# Altium PCB ECG_Ctrl_V1.0_ZM_20211208.PcbDoc (part 2 of 2)
Units mil, origin at the board's own origin, x right, y up, seen from the top; angles counter-clockwise.
Board outline 3748.77 x 3514.71 mil, 2 copper layers (Top Layer, Bottom Layer); 220 components, 162 nets, 692 pads, 666 vias.
Unrouted connection lines stored in the file: 1.
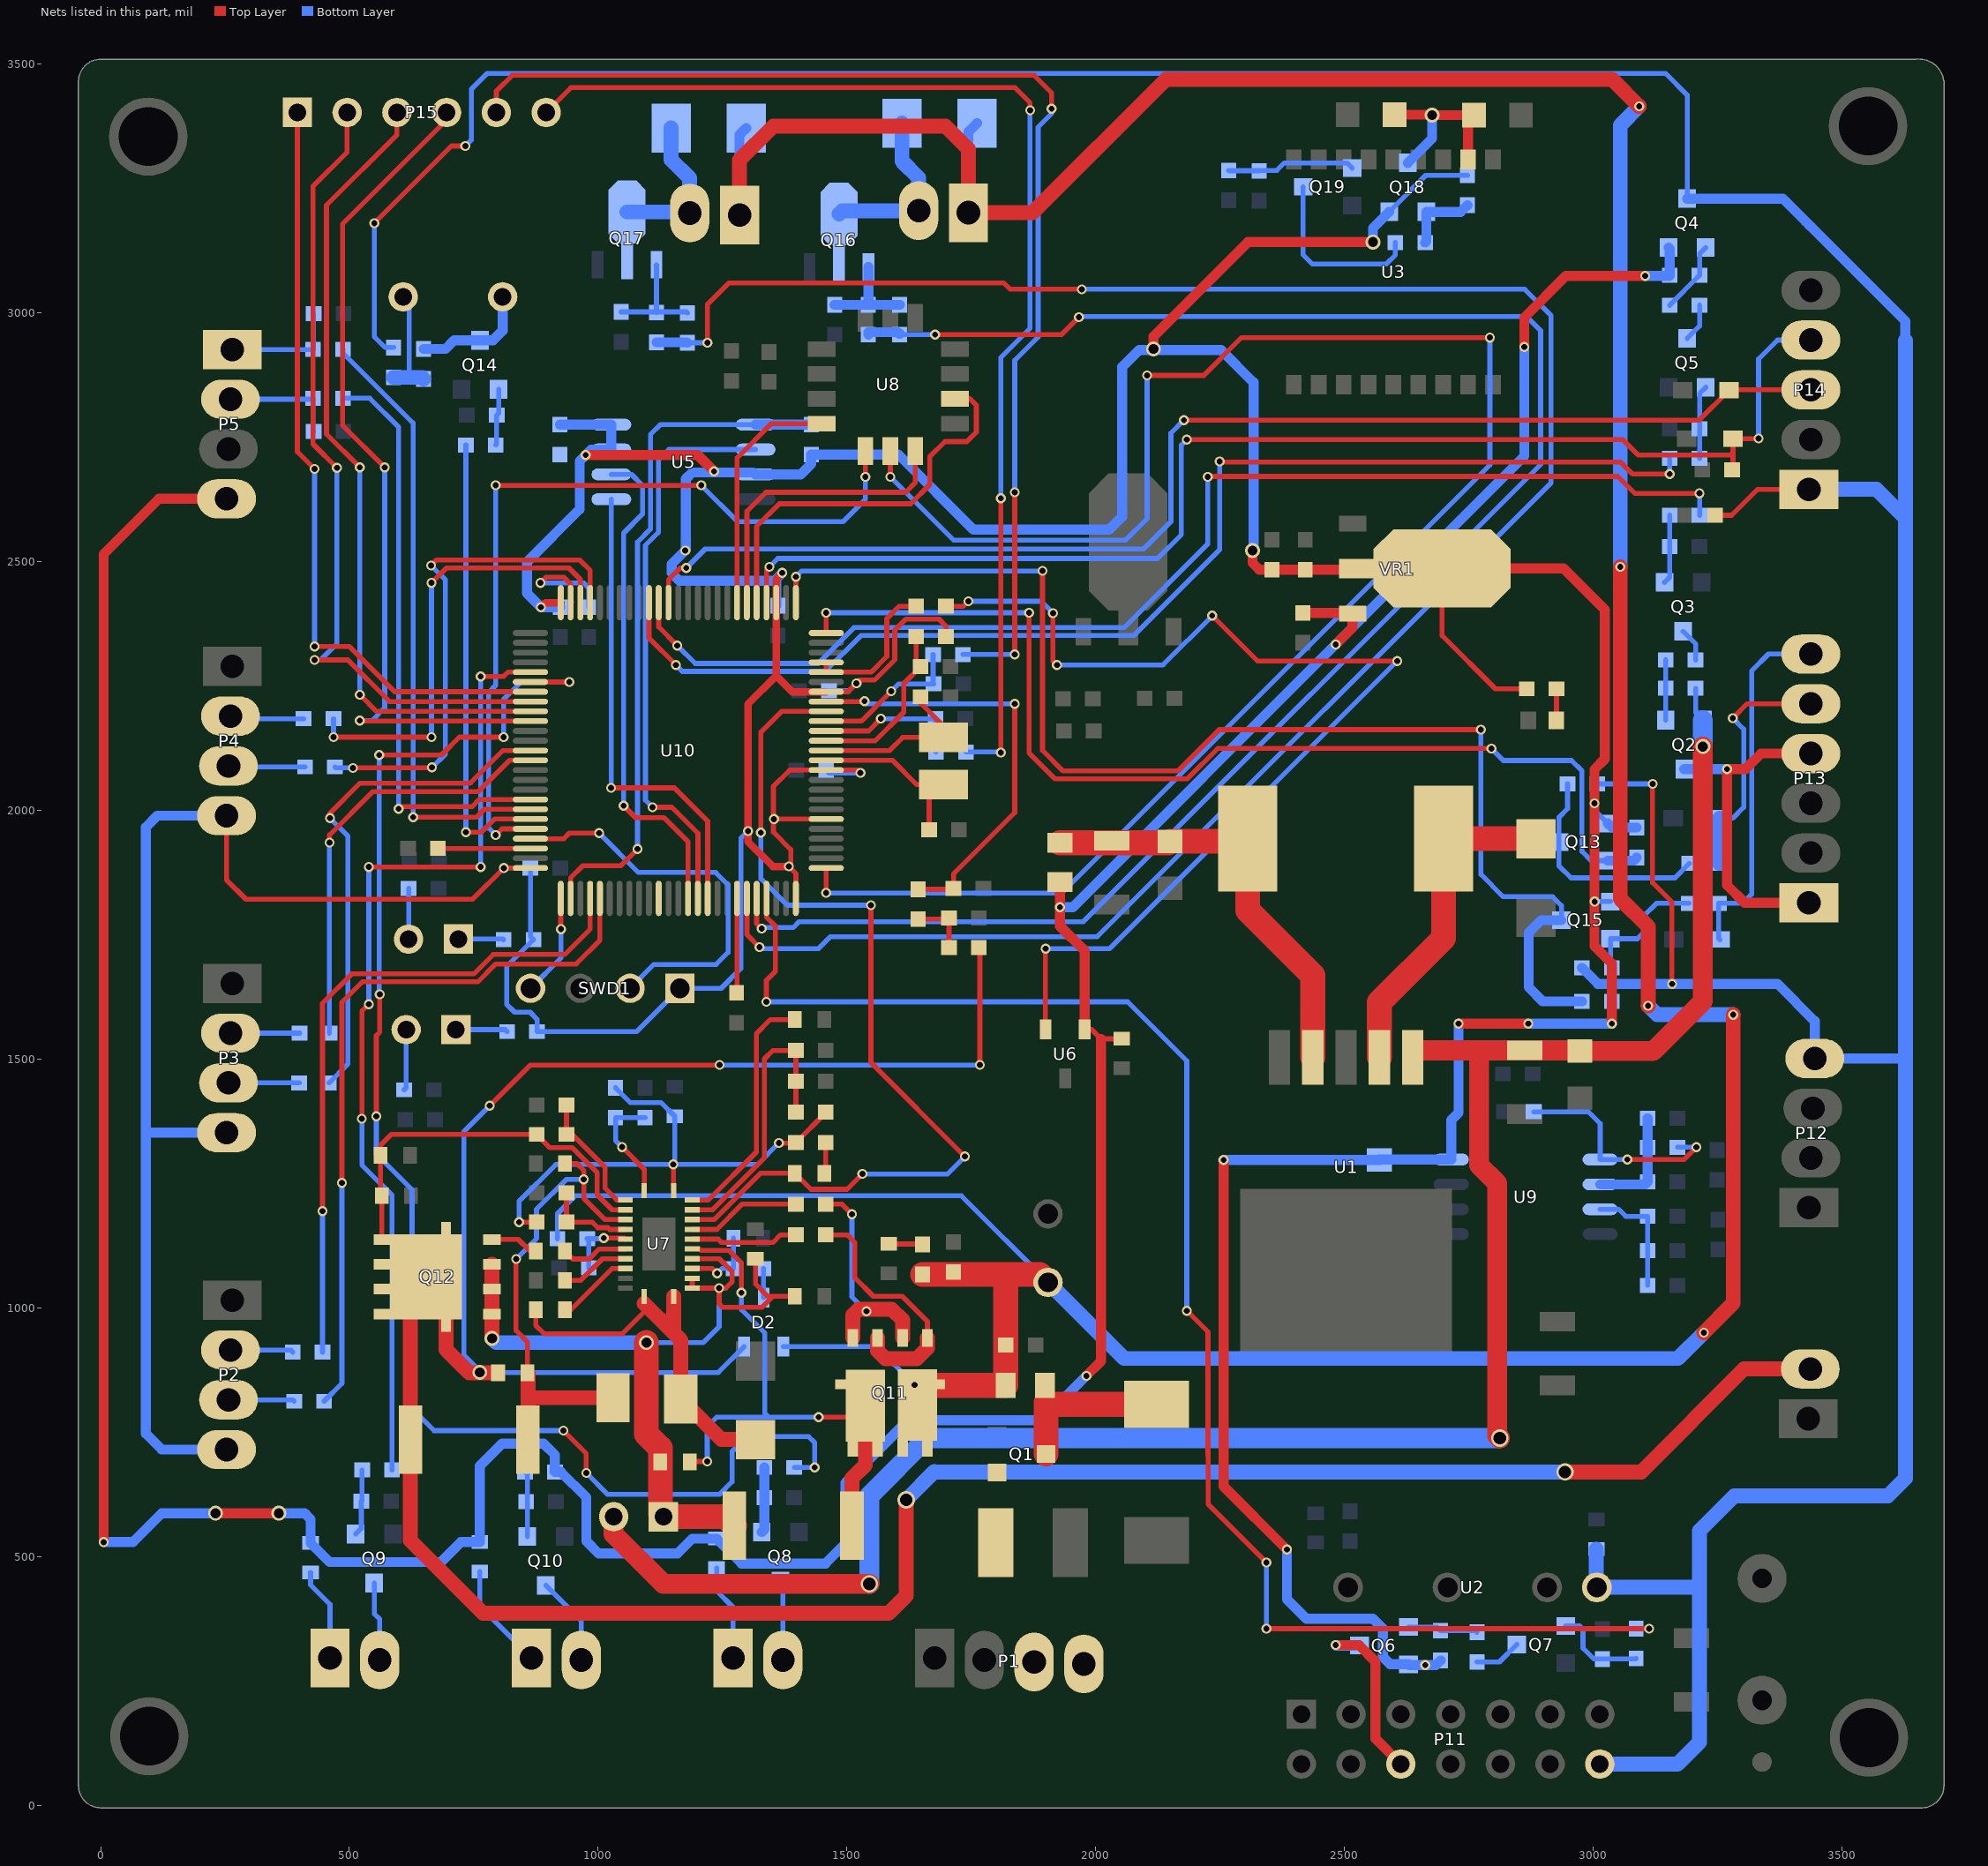
[diagram p2: the nets of this part, all layers, seen from the top]

## Via types
v1: diameter 30, hole 20, Top Layer to Bottom Layer, tented both sides, 436 vias
v2: diameter 20, hole 12, Top Layer to Bottom Layer, tented both sides, 224 vias
v3: diameter 35, hole 25, Top Layer to Bottom Layer, tented both sides, 4 vias
v4: diameter 40, hole 25, Top Layer to Bottom Layer, tented both sides, 2 vias

## Nets (pads, with @x,y where several pads share a name; then routed paths per layer and width w, separated by ;. In a path a pad name is that pad's centre, name@x,y a point inside that pad or via, vN(x,y) a via of type N, cw(c..) or ccw(c..) an arc to the next point about the centre after c; other vN are vias at no path point) (continued)
LED1: R29.1 U10.55 | length 1954.1
  Top Layer w10: v2(525,1380) 525,1596 v2(539,1610) ; v2(539,1886) v2(764,1886) ; v2(764,2269) 810,2269 818.48,2277.48 U10.55@863.76,2277.48
  Bottom Layer w10: v2(525,1380) 525,1287 585.54,1226.46 R29.1@585.54,674 ; v2(539,1610) v2(539,1886) ; v2(764,1886) v2(764,2269)
LED2: R28.1 U10.56 | length 2995
  Top Layer w10: v2(554,1385) 554,1547 561,1554 v2(561,1630) ; v2(560,2111) 685,2111 721,2147 v2@809,2147 ; U10.56@863.76,2257.8 v2(942.2,2257.8) ; v2(930,753) 976,707 v2(976,668)
  Bottom Layer w10: v2(554,1385) 554,1309 626,1237 626,797 670,753 v2(930,753) ; v2(560,2111) 560,1631 v2(561,1630) ; v2(810,2147) 810,2223.11 844.69,2257.8 v2(942.2,2257.8) ; v2(976,668) 1019,625 1244,625 1269,650 1269,711 1299,741 1423,741 1435,729 v2(1435,679) R28.1@1394,679
LED_BLUE: U10.86
MMR_CS: U8.5 U10.71 | length 1678.4
  Top Layer w10: v2(794,1950) 806.52,1962.52 U10.71@863.76,1962.52 ; v2(794,2653) v2(1207,2653) ; v2(1537,2670) U8.5@1537,2721.95
  Bottom Layer w10: v2(794,1950) 780,1964 780,2237 794,2251 v2(794,2653) ; v2(1207,2653) 1280,2580 1492,2580 1537,2625 v2(1537,2670)
MMR_DIN: U8.4 U10.32 | length 489.4
  Top Layer w10: U10.32@1279.11,2417.24 1279.11,2708.11 1347.87,2776.87 U8.4@1449.2,2776.87
MMR_DO: U8.7 U10.31 | length 609.4
  Top Layer w10: U10.31@1298.8,2417.24 1298.8,2600.8 1337,2639 1618,2639 1637,2658 U8.7@1637,2721.95
MMR_RD: U8.6 U10.1 | length 3643
  Top Layer w10: v2(1458.24,1833.76) U10.1@1458.24,1883.78 ; v2(1587,2670) U8.6@1587,2721.95 ; v2(2103,2874) 2217,2874 2293,2950 v2(2792,2950)
  Bottom Layer w10: v2(1458.24,1833.76) 1931.76,1833.76 2792,2694 v2(2792,2950) ; v2(1587,2670) 1714,2543 2060,2543 2103,2586 v2(2103,2874)
MMR_SCLK: U8.9 U10.30 | length 808.5
  Top Layer w10: U10.30@1318.48,2417.24 1318.48,2570.48 1364,2616 1628,2616 1666.5,2654.5 1666.5,2710.5 1697,2741 1741,2741 1760,2760 1760,2814 1747.13,2826.87 U8.9@1716.92,2826.87
MOTOR: C166.2 R188.2 U10.95 | length 4344.6
  Top Layer w10: v2(1219.49,2939.51) 1219.49,3016.49 1263,3060 1815,3060 1828,3047 v2(1972,3047) ; U10.95@1298.8,1822.76 1298.8,1750.2 v2(1324,1725)
  Bottom Layer w10: C166.2@1179.26,2939.51 v2(1219.49,2939.51) ; v2(1324,1725) 1327,1722 1443,1722 1467,1746 2003,1746 2915,2658 2915,2994 2862,3047 v2(1972,3047)
  Bottom Layer w20: R188.2@1117.26,2940.51 1178.26,2940.51 C166.2@1179.26,2939.51
NetBEEP1_1: BEEP1.1 R56.1 R58.2 | length 228.2
  Bottom Layer w10: BEEP1.1@608,3032 620,3020 620,2870
  Bottom Layer w30: R56.1@589,2870 620,2870 646,2870 R58.2@649,2867
NetBEEP1_2: BEEP1.2 Q14.3 R58.1 | length 242.3
  Bottom Layer w20: R58.1@649,2927 693,2927 710.43,2944.43 Q14.3@762.6,2944.43 788.43,2944.43 808,2964 BEEP1.2@808,3032
NetC2_1: C2.1 C4.2 F1.1 L1.2 U1.4 | length 875
  Top Layer w50: F1.1@1928,1934.42 2146,1934.42 C4.2@2149,1937.42 2299.57,1937.42 L1.2@2305.15,1943 2305.15,1798.85 2436.07,1667.93 U1.4@2436.07,1502.94
NetC19_1: C19.1 R24.1 U10.16 | length 306.2
  Top Layer w10: U10.16@1458.24,2179.06 1529.06,2179.06 v2(1589,2239)
  Bottom Layer w10: v2(1589,2239) 1604,2254 C19.1@1674,2254 1673,2255 R24.1@1673,2313
NetC20_1: C20.1 R23.1 U10.15 | length 297.4
  Top Layer w10: U10.15@1458.24,2159.37 1543.37,2159.37 v2(1568,2184)
  Bottom Layer w10: v2(1568,2184) C20.1@1678,2184 1678,2118 R23.1@1679,2117
NetC22_1: C22.1 C23.2 C25.1 P9.1 Q12.1 Q12.2 Q12.3 R34.2 U7.2 U7.3 U7.5 | length 1722.3
  Top Layer w10: U7.3@1189.07,1059.1 1189.07,1039.49 U7.2@1189,1039.42 v2(1243,1039.42) ; U7.5@1189.07,1098.47 1243.53,1098.47 1269,1073 1269,1052 1256.42,1039.42 v2(1243,1039.42) ; C25.1@1315.91,1098.47 1315.91,1048.09 1340.84,1023.16 1351.16,1023.16 ; C22.1@1395.46,1023.16 1351.16,1023.16 ; v2(1243,1039.42) 1243,1008 1250.29,1000.71 1328.71,1000.71 1351.16,1023.16
  Top Layer w30: v1(786.78,938.22) Q12.1@786.78,987.37 Q12.2@786.78,1037.37 Q12.3@786.78,1087.37
  Top Layer w50: v1(1097,930) 1097,746 1125,718 C23.2@1125,690 1125,586 P9.1@1131,580 1255.78,580 R34.2@1273.78,562
  Bottom Layer w10: v1(1097,930) 1211,930 1243,962 v2(1243,1039.42)
  Bottom Layer w30: v1(786.78,938.22) 795,930 v1(1097,930)
NetC23_1: C23.1 Q11.5 Q11.6 R34.1 U7.6 | length 1121.4
  Top Layer w10: C23.1@1184.06,690 1185.17,691.11 v2(1219,691.11) ; 1204,1118.16 1207.16,1115 1263,1115 1288,1090 v2(1288,1030) ; v2(1443,780) 1513.75,780 Q11.5@1536.91,803.16
  Top Layer w30: R34.1@1510,562 1510,657 1536.91,683.91 Q11.5@1536.91,803.16
  Bottom Layer w10: v2(1219,691.11) 1219,761 1238,780 1343,780 ; v2(1288,1030) 1288,996 1335,949 1335,788 1343,780 ; v2(1443,780) 1343,780
NetC24_1: C24.1 R35.1 | length 68.4
  Top Layer w10: C24.1@1583.91,1128.21 1650.86,1128.21 R35.1@1651.91,1127.16
NetC27_2: C27.2 C28.2 L4.2 R40.1 U7.16 | length 983.5
  Top Layer w10: v2(835,1098) 835,954.22 857.91,931.3 C28.2@857.91,869.16 ; C27.2@933.52,1289.88 957.12,1289.88 971,1276 v2(971,1258) 971,1220 1013.79,1177.21 U7.16@1054.91,1177.21
  Top Layer w30: C28.2@857.91,869.16 858.91,868.16 858.91,824 ; R40.1@858.91,735.16 858.91,824 ; L4.2@1029.91,819.16 863.75,819.16 858.91,824
  Bottom Layer w10: v2(835,1098) 876,1139 876,1198 936,1258 v2(971,1258)
NetC29_1: C29.1 D4.2 L4.1 U7.1 U7.24 | length 784.7
  Top Layer w10: C29.1@874.46,996.16 874.46,964.54 891,948 1049,948 1092.47,991.47 1092.47,1008.53 U7.24@1092.47,1022.58
  Top Layer w30: U7.24@1092.47,1008.53 1151.53,949.47 ; U7.1@1151.53,1022.58 1151.53,949.47 ; D4.2@1315.91,735.16 1247.43,735.16 L4.1@1165.74,816.85 1165.74,935.26 1151.53,949.47
NetC29_2: C29.2 U7.21 | length 155.6
  Top Layer w10: C29.2@933.52,996.16 945.16,996.16 1027.79,1078.79 U7.21@1054.91,1078.79
NetC32_1: C32.1 R45.2 U7.4 | length 152.3
  Top Layer w10: U7.4@1189.07,1078.79 1229.37,1078.79 v2(1239,1069.16)
  Bottom Layer w10: v2(1239,1069.16) 1248.63,1078.79 R45.2@1272.13,1078.79 1271.94,1078.97 C32.1@1271.94,1140
NetC33_2: C33.2 U7.20 | length 139.4
  Top Layer w10: C33.2@933.52,1054.9 964.9,1054.9 1008.47,1098.47 U7.20@1054.91,1098.47
NetC34_1: C34.1 U7.11 | length 496
  Top Layer w10: U7.11@1189.07,1216.58 1221.58,1216.58 1318,1313 1318,1551 1346.16,1579.16 C34.1@1395.46,1579.16
NetC36_1: C36.1 U10.12 Y1.2 | length 317.4
  Top Layer w10: U10.12@1458.24,2100.31 1591.69,2100.31 1640.55,2051.45 1665,2051.45 C36.1@1665,1961
NetC37_1: C37.1 R61.1 R63.2 U9.2 | length 225.3
  Bottom Layer w20: U9.2@3013.61,1248 3103.8,1248 R63.2@3109,1253.2 R61.1@3109,1322.6 C37.1@3109,1381
NetC39_2: C39.2 U10.49 | length 250.4
  Top Layer w10: v2(884,2457) 895,2468 931.4,2468 944.46,2454.94 U10.49@944.46,2417.24 U10.49@946,2418.78
  Bottom Layer w10: v2(884,2457) 971,2457 981,2447 C39.2@981,2408
NetC40_2: C40.2 R78.1 U10.14 | length 349.6
  Top Layer w10: U10.14@1458.24,2139.68 1556.69,2139.68 1614,2197 1614,2254.66 C40.2@1648,2288.67 1639,2297.67 R78.1@1639,2349.33
NetC41_2: C41.2 R65.2 R66.2 U9.3 | length 240.1
  Bottom Layer w10: U9.3@3013.61,1198 3051,1198 3065.2,1183.8 R65.2@3109,1183.8 C41.2@3109,1115 R66.2@3109,1045
NetC45_2: C45.2 U10.73 | length 185.8
  Top Layer w10: C45.2@678,1923.15 U10.73@863.76,1923.15
NetC50_1: C50.1 U10.13 Y1.1 | length 347.4
  Top Layer w10: U10.13@1458.24,2120 1585.76,2120 1612,2146.24 Y1.1@1694,2146.24 1694,2169 1648,2215 C50.1@1648,2228
NetC165_1: C165.1 Q16.1 R187.1 R189.1 | length 207.2
  Bottom Layer w20: R189.1@1475,3016 R187.1@1543,3016 ; Q16.1@1543.06,3092.13 1543.06,3016.06 R187.1@1543,3016 ; C165.1@1606,3016 R187.1@1543,3016
NetC166_1: C166.1 Q17.1 R188.1 R190.1 | length 229.5
  Bottom Layer w10: R190.1@1046.26,3001.51 R188.1@1117.06,3001.51 ; Q17.1@1117.06,3096.13 R188.1@1117.06,3001.51 ; R188.1@1117.26,3000.51 1117.06,3000.71 R188.1@1117.06,3001.51 ; C166.1@1179.26,2999.51 1177.26,3001.51 R188.1@1117.06,3001.51
NetD1_1: D1.1 F2.1 Q1.3 | length 327.4
  Top Layer w50: Q1.3@1900.21,706 1900.21,810 1904.21,806 D1.1@2122,806
NetD2_3: D2.3 R45.1 | length 58.6
  Bottom Layer w10: R45.1@1332.13,1078.79 1332.13,1020.92 D2.3@1332.63,1020.43
NetD3_2: D3.2 L1.1 U1.2 | length 679.8
  Top Layer w50: U1.2@2569.93,1502.94 2569.93,1613.93 2698.85,1742.85 L1.1@2698.85,1943 2884.48,1943 D3.2@2885,1942.48
NetD7_1: D7.1 P22.2 Q16.2 | length 352.6
  Bottom Layer w30: Q16.2@1484,3198.43 1490.5,3204.94 P22.2@1644,3204.94 1644,3271 1610.61,3304.39 D7.1@1610.61,3381
NetD8_1: D8.1 P27.2 Q17.2 | length 313.1
  Bottom Layer w30: Q17.2@1058,3202.43 1181.87,3202.43 P27.2@1184,3200.31 1184,3270 1146.61,3307.39 D8.1@1146.61,3371
NetDS1_1: DS1.1 P1.3 P1.4 Q1.2
NetL3_2: L3.2 U10.21 U10.22 | length 299.9
  Top Layer w10: U10.22@1458.24,2297.17 U10.21@1458.24,2277.48 1548.48,2277.48 1580,2309 1580,2385 1605,2410 L3.2@1639,2410
NetLED1_1: LED1.1 R1.2 | length 63.7
  Top Layer w10: LED1.1@2925.56,2180.48 2926,2180.92 R1.2@2926,2244
NetLED2_1: LED2.1 R49.2 | length 62.7
  Top Layer w10: LED2.1@1454.52,1270.27 1457.21,1272.97 R49.2@1457.21,1331.83
NetNC_2: NC.2 U5.1 U10.77 | length 1374.9
  Top Layer w10: U10.77@944.46,1822.76 944.46,1864 968.96,1888.5 1045.5,1888.5 v2(1079,1922)
  Bottom Layer w10: v2(1079,1922) 1079,2539 1105,2565 1105,2755 1125,2775 U5.1@1316.37,2775
  Bottom Layer w20: U5.1@1316.37,2775 NC.2@1428,2775
NetP2_2: P2.2 R20.1 | length 126.7
  Bottom Layer w10: P2.2@260.94,915 382,915 R20.1@386,911
NetP2_3: P2.3 R19.1 | length 133.2
  Bottom Layer w10: P2.3@257,815 386,815 R19.1@389,812
NetP3_2: P3.2 R22.1 | length 139.1
  Bottom Layer w10: P3.2@260.94,1552 R22.1@400,1552
NetP3_3: P3.3 R21.1 | length 142
  Bottom Layer w10: P3.3@257,1452 R21.1@399,1452
NetP4_2: P4.2 R11.1 | length 149.1
  Bottom Layer w10: P4.2@260.94,2189 265.94,2184 R11.1@408,2184
NetP4_3: P4.3 R9.1 | length 154.8
  Bottom Layer w10: P4.3@257,2089 259,2087 R9.1@411,2087
NetP5_1: P5.1 R12.1 TVS4.2 | length 234.5
  Bottom Layer w10: P5.1@264.87,2926 R12.1@427,2926 428,2927 TVS4.2@428,2998
NetP5_2: P5.2 R10.1 TVS3.2 | length 234.3
  Bottom Layer w10: P5.2@260.94,2826 425,2826 R10.1@427,2828 427,2762 TVS3.2@428,2761
NetP6_1: P6.1 R25.1 | length 194.7
  Bottom Layer w10: R25.1@1238,477 1238,431 1271,398 P6.1@1271,296
NetP6_2: P6.2 Q8.3 | length 160.8
  Bottom Layer w10: Q8.3@1366,450.79 1371,445.79 P6.2@1371,292.06
NetP7_1: P7.1 R26.1 | length 188.2
  Bottom Layer w10: R26.1@422,468 422,443 461,404 P7.1@461,296
NetP7_2: P7.2 Q9.3 | length 159.3
  Bottom Layer w10: Q9.3@550,446.79 550,385 561,374 P7.2@561,292.06
NetP8_1: P8.1 R27.1 | length 217
  Bottom Layer w10: R27.1@762,469.94 762,400 P8.1@866,296
NetP8_2: P8.2 Q10.3 | length 179.2
  Bottom Layer w10: Q10.3@895,441.84 966,370.84 P8.2@966,292.06
NetP10_1: P10.1 R47.1 R50.2 U7.10 | length 580.9
  Top Layer w10: U7.10@1189.07,1196.9 1229.9,1196.9 1334,1301 1334,1500 1351.16,1517.16 P10.1@1397.21,1517.16 R50.2@1397.21,1455.39 R47.1@1397.21,1393.61
NetP14_3: P14.3 TVS6.2 U10.39 | length 2604.1
  Top Layer w10: U10.39@1141.31,2417.24 1141.31,2463.31 1165,2487 v2(1177,2487) ; v2(2177,2784) 3212.46,2784 TVS6.2@3272.46,2844 3273.46,2845 P14.3@3437,2845
  Bottom Layer w10: v2(1177,2487) 1215,2525 2096,2525 2151,2580 2151,2758 v2(2177,2784)
NetP14_4: P14.4 R54.2 TVS1.2 U10.29 | length 2635.7
  Top Layer w10: U10.29@1338.17,2417.24 1338.17,2483.17 v2(1344,2489) ; v2(2183,2745) 3059,2745 3090,2714 3275.46,2714 3280.46,2719 ; R54.2@3279,2684 3280.46,2685.46 3280.46,2719 ; TVS1.2@3282.46,2745 TVS1.2@3280.46,2747 ; v2(3332,2747) TVS1.2@3280.46,2747 ; 3280.46,2719 TVS1.2@3280.46,2747
  Bottom Layer w10: v2(1344,2489) 1361,2506 2124,2506 2172,2554 2172,2734 v2(2183,2745) ; v2(3332,2747) 3332,2907 3370,2945 P14.4@3437,2945
NetP16_1: P16.1 R183.1 | length 91.4
  Bottom Layer w10: P16.1@719,1741 809,1741 R183.1@810,1740
NetP16_2: P16.2 R184.1 | length 102
  Bottom Layer w10: P16.2@619,1741 R184.1@619,1843
NetP17_1: P17.1 R185.1 | length 104.7
  Bottom Layer w10: P17.1@714,1559 813,1559 R185.1@817,1555
NetP17_2: P17.2 R186.1 | length 122.7
  Bottom Layer w10: R186.1@610,1438 614,1442 P17.2@614,1559
NetQ2_1: Q2.1 R2.2 R3.2 | length 121
  Bottom Layer w10: Q2.1@3145.32,2181 R2.2@3145.32,2245 R3.2@3145.32,2302
NetQ3_1: Q3.1 R4.2 R5.2 | length 139.3
  Bottom Layer w10: Q3.1@3143,2458 3153.32,2468.32 R5.2@3153.32,2530 R4.2@3153.32,2593
NetQ3_3: Q3.3 R3.1 | length 67.9
  Bottom Layer w10: Q3.3@3180.4,2359.57 3205.32,2334.65 R3.1@3205.32,2302
NetQ4_1: Q4.1 R6.2 R7.2 | length 145.9
  Bottom Layer w10: R7.2@3153.32,3015 R6.2@3213.32,3075 3213.32,3118.2 Q4.1@3225.91,3130.79
NetQ5_1: Q5.1 R13.2 R14.2 | length 148.2
  Bottom Layer w10: R13.2@3213.32,2707 R14.2@3213.32,2767 3213.32,2837.42 Q5.1@3225.91,2850
NetQ5_3: Q5.3 R7.1 | length 76.9
  Bottom Layer w10: Q5.3@3188.5,2948.43 3213.32,2973.24 R7.1@3213.32,3015
NetQ6_1: Q6.1 R15.2 R16.2 | length 141.9
  Bottom Layer w10: Q6.1@2628.43,358.4 2685.6,358.4 R15.2@2693,351 2763,351 R16.2@2766,348
NetQ7_1: Q7.1 R17.2 R18.2 | length 191.8
  Bottom Layer w10: Q7.1@2944.43,360.4 2972.6,360.4 2979,354 2979,316 3001,294 R18.2@3018,294 3085,294 R17.2@3086,295
NetQ7_3: Q7.3 R16.1 | length 94.5
  Bottom Layer w10: R16.1@2766,288 2811,288 Q7.3@2846,323
NetQ8_1: Q8.1 R28.2 R31.1 | length 132
  Bottom Layer w20: Q8.1@1328.6,549.21 1334,554.61 R31.1@1334,618 R28.2@1334,679
NetQ9_1: Q9.1 R29.2 R32.1 | length 134.1
  Bottom Layer w10: Q9.1@512.6,545.21 524,556.61 R32.1@524,611 525.54,612.54 R29.2@525.54,674
NetQ10_1: Q10.1 R30.2 R33.1 | length 131.6
  Bottom Layer w10: R30.2@853,670 857.6,665.4 Q10.1@857.6,540.27
NetQ11_1: Q11.1 Q11.3 R36.1 | length 512.9
  Top Layer w10: R36.1@1457.21,1146.5 1500.5,1146.5 1516,1131 1516,1060 1553,1023 1611,1023 1661.57,972.43 Q11.1@1661.57,939.04
  Top Layer w30: Q11.3@1561.57,939.04 1561.57,913.43 1577.51,897.49 1640.49,897.49 1661.57,918.57 Q11.1@1661.57,939.04
NetQ11_2: Q11.2 Q11.4 R37.2 | length 464.8
  Top Layer w10: R37.2@1457.21,1208.28 1489.73,1208.28 v2(1510,1188)
  Top Layer w30: Q11.4@1511.57,939.04 1511.57,985.57 1523,997 1590,997 1611.57,975.43 Q11.2@1611.57,939.04
  Bottom Layer w10: v2(1510,1188) 1510,1022 v2(1539,993)
NetQ12_4: Q12.4 R39.2 | length 97.5
  Top Layer w10: Q12.4@786.78,1137.37 839.28,1137.37 863,1113.65 R39.2@874.46,1113.65
NetQ13_2: Q13.2 R62.1 U10.25 | length 2189.3
  Top Layer w10: U10.25@1458.24,2356.22 v2(1458.24,2397) ; v2(1866,2397) 1866,2115 1918,2063 2184,2063 2245,2124 v2(2795,2124)
  Bottom Layer w10: v2(1458.24,2397) v2(1866,2397) ; v2(2795,2124) 2819,2100 2956,2100 2977,2079 2977,1917 2995.4,1898.6 Q13.2@3029.21,1898.6
  Bottom Layer w20: Q13.2@3029.21,1898.6 3080.6,1898.6 R62.1@3087,1905
NetQ13_3: Q13.3 R55.2 R60.1 | length 456.1
  Bottom Layer w10: R60.1@2948,2053 2948,2003 2930.79,1985.79 Q13.3@2930.79,1936 2930.79,1888.27 2955.06,1864 3164,1864 R55.2@3193,1893
NetQ14_1: Q14.1 R57.2 R59.1 | length 114.5
  Bottom Layer w10: R57.2@794,2734 796,2736 R59.1@796,2794 800,2798 Q14.1@800,2846
NetQ15_2: Q15.2 R52.2 R53.2 | length 266.4
  Bottom Layer w10: R52.2@3037,1683 3034.21,1685.79 Q15.2@3034.21,1741.6 3088.6,1741.6 3101.5,1754.5 3101.5,1787.5 3127,1813 R53.2@3192,1813
NetQ15_3: Q15.3 R67.2 U10.26 | length 2657.7
  Top Layer w10: U10.26@1397.22,2417.24 v2(1397.22,2469.22) ; v2(1893,2481) 1893,2120 1934,2079 2165,2079 2248,2162 v2(2774,2162)
  Bottom Layer w10: v2(1397.22,2469.22) 1409,2481 v2(1893,2481) ; v2@2774,2161 2774,1871 2818.84,1826.16 2917.84,1826.16 2935.79,1808.21 Q15.3@2935.79,1779
  Bottom Layer w20: Q15.3@2935.79,1779 2895,1779 2870,1754 2870,1644 2898,1616 R67.2@2977,1616
NetQ18_1: Q18.1 R68.2 R69.2 | length 150.7
  Bottom Layer w20: R69.2@2662,3141 2664.4,3143.4 Q18.1@2664.4,3202.57 2733.57,3202.57 R68.2@2747,3216
NetQ19_1: Q19.1 R70.2 R71.2 | length 320.2
  Bottom Layer w10: R71.2@2328,3285 2268,3285 R70.2@2267,3286 2364,3286 2379,3301 2504.61,3301 Q19.1@2515.21,3290.4
NetQ19_3: Q19.3 R69.1 | length 362
  Bottom Layer w10: Q19.3@2416.79,3253 2416.79,3116.21 2435,3098 2584,3098 2602,3116 R69.1@2602,3141
NetR36_2: R36.2 U7.7 | length 217.4
  Top Layer w10: U7.7@1189.07,1137.84 1241.16,1137.84 1248,1131 1351,1131 1366.5,1146.5 R36.2@1397.21,1146.5
NetR37_1: R37.1 U7.8 | length 229.2
  Top Layer w10: U7.8@1189.07,1157.53 1238.53,1157.53 1289.27,1208.28 R37.1@1397.21,1208.28
NetR38_1: R38.1 R41.2 U7.17 | length 183.5
  Top Layer w10: R41.2@936.21,1230.92 R38.1@936.21,1172.18 987.82,1172.18 999,1161 1019.7,1161 1023.17,1157.53 U7.17@1054.91,1157.53
NetR39_1: R39.1 U7.19 | length 136.2
  Top Layer w10: R39.1@933.52,1113.65 949.17,1098 982,1098 1002.16,1118.16 U7.19@1054.91,1118.16
NetR42_2: R42.2 R44.2 U7.13 | length 229.9
  Top Layer w10: v2(1048,1323) 1092.47,1278.53 U7.13@1092.47,1235.45
  Bottom Layer w10: v2(1048,1323) 1034.91,1336.09 R42.2@1034.91,1382.16 R44.2@1094.3,1382.16
NetR43_1: R43.1 R46.2 U7.18 | length 138.3
  Top Layer w10: v2(1011,1140) 1052.75,1140 U7.18@1054.91,1137.84
  Bottom Layer w10: R46.2@981,1080 981,1135.79 R43.1@978,1138.79 1009.79,1138.79 v2(1011,1140)
NetR48_2: R48.2 R51.1 U7.14 | length 256.7
  Top Layer w10: R51.1@936.21,1407.16 R48.2@936.21,1348.41 947.59,1348.41 1014,1282 1014,1240 1037.42,1216.58 U7.14@1054.91,1216.58
NetR57_1: R57.1 U10.70 | length 918.6
  Top Layer w10: v2(734,1956) 765.48,1956 791.69,1982.2 U10.70@863.76,1982.2
  Bottom Layer w10: v2(734,1956) R57.1@734,2734
NetR61_2: R61.2 R64.1 U9.1 | length 457.4
  Top Layer w10: v2(3068,1298) 3182.4,1298 v2(3207,1322.6)
  Bottom Layer w10: R64.1@2880,1394 2990,1394 3013.61,1370.39 U9.1@3013.61,1298 v2(3068,1298) ; R61.2@3169,1322.6 v2(3207,1322.6)
NetR79_2: R79.2 U10.94 | length 190.2
  Top Layer w10: R79.2@1278,1633 1279.11,1634.11 U10.94@1279.11,1822.76
NetR180_2: R180.2 R181.1 R182.1 | length 122.5
  Top Layer w10: R181.1@1643,1781 1702.5,1781 R182.1@1705,1783.5 R180.2@1705,1724
NetU5_2: U5.2 U10.90 | length 1162.6
  Top Layer w10: v2(1109,2006) 1148,2006 1200.37,1953.63 U10.90@1200.37,1822.76
  Bottom Layer w10: v2(1109,2006) 1095,2020 1095,2532.37 1121,2558.37 1121,2704 1142,2725 U5.2@1316.37,2725
NetU5_5: U5.5 U10.91 | length 957
  Top Layer w10: v2(1026,2045) 1153,2045 1220.06,1977.94 U10.91@1220.06,1822.76
  Bottom Layer w10: v2@1026.37,2045 U5.5@1026.37,2625
NetU5_6: U5.6 U10.89 | length 1004.8
  Top Layer w10: v2(1051,2009) 1075,1985 1132,1985 1180.69,1936.31 U10.89@1180.69,1822.76
  Bottom Layer w10: U5.6@1026.37,2675 1067,2675 1089,2653 1089,2595 1051,2557 v2(1051,2009)
OUT1: P15.1 U10.57 | length 1559.4
  Top Layer w10: P15.1@395.37,3402.63 395.37,2720.63 v2(430,2686) ; v2(430,2329) 500,2329 590.89,2238.11 U10.57@863.76,2238.11
  Bottom Layer w10: v2(430,2329) v2(430,2686)
OUT2: P15.2 U10.58 | length 1642.9
  Top Layer w10: v2(430,2302) 497,2302 580.57,2218.43 U10.58@863.76,2218.43 ; v2(475,2688) 427,2736 427,3254 495.37,3322.37 P15.2@495.37,3402.63
  Bottom Layer w10: v2(430,2302) 442,2302 475,2335 v2(475,2688)
OUT3: P15.3 U10.59 | length 1613.5
  Top Layer w10: v2(521,2232) 554.26,2198.74 U10.59@863.76,2198.74 ; v2(521,2689) 454,2756 454,3216 595.37,3357.37 P15.3@595.37,3402.63
  Bottom Layer w10: v2(521,2232) v2(521,2689)
OUT4: P15.4 U10.60 | length 1722.5
  Top Layer w10: v2(521,2180) 521.94,2179.06 U10.60@863.76,2179.06 ; v2(571,2689) 486,2774 486,3178 695.37,3387.37 P15.4@695.37,3402.63
  Bottom Layer w10: v2(521,2180) 545,2180 571,2206 v2(571,2689)
POW_EN_3.3V: R17.1 U10.97 | length 3119.2
  Top Layer w10: v2(1338,1615) 1338,1658 1356,1676 1356,1767 1338.17,1784.83 U10.97@1338.17,1822.76 ; v2(2183,994) 2225.5,951.5 2225.5,704 2226,703.5 2226,605 v2(2343,488) ; v2(2343,355) v2(3112,355)
  Bottom Layer w10: v2(1338,1615) 2064,1615 2183,1496 v2(2183,994) ; v2(2343,355) v2(2343,488) ; R17.1@3086,355 v2(3112,355)
POW_EN_5V: R13.1 U10.41 | length 2470.6
  Top Layer w10: U10.41@1101.94,2417.24 1101.94,2346.06 v2(1156,2292) ; v2(2249,2701) 2250,2700 3054,2700 3078.32,2675.68 v2(3153.32,2675.68)
  Bottom Layer w10: v2(1156,2292) 1169,2279 1456,2279 1528,2351 2076,2351 2249,2524 v2(2249,2701) ; v2(3153.32,2675.68) R13.1@3153.32,2707
PRESS_EN: R4.1 U10.40 | length 2463.9
  Top Layer w10: U10.40@1121.63,2417.24 1121.63,2368.37 v2(1159,2331) ; v2(2225,2670) 2226,2671 3049,2671 3083,2637 v2(3213.32,2637)
  Bottom Layer w10: v2(1159,2331) 1195,2295 1442,2295 1514,2367 2057,2367 2225,2535 v2(2225,2670) ; R4.1@3213.32,2593 v2(3213.32,2637)
RXD: P13.5 R55.1 TVS5.2 | length 506
  Top Layer w10: v2(3280,2185) 3309,2214 P13.5@3437,2214
  Bottom Layer w10: TVS5.2@3253.46,1984 3280,1984 3302,2006 3302,2163 v2(3280,2185)
  Bottom Layer w30: R55.1@3253,1893 3253.46,1893.46 TVS5.2@3253.46,1984
RXD2: R11.2 U10.48 | length 911.8
  Top Layer w10: v2(468,2147) v2(665,2147) ; v2(665,2457) 695,2487 941.09,2487 964.15,2463.94 U10.48@964.15,2417.24
  Bottom Layer w10: v2(468,2147) R11.2@468,2184 ; v2(665,2147) v2(665,2457)
RXD3: R12.2 U10.69 | length 1240.7
  Top Layer w10: v2(628,1986) 755.11,1986 771,2001.89 U10.69@863.76,2001.89
  Bottom Layer w10: R12.2@487,2926 487,2919.25 628,2778.25 v2(628,1986)
RXD4: R22.2 U10.64 | length 864
  Top Layer w10: v2(460,1935) 460,1950 547.57,2037.57 759.26,2037.57 822,2100.31 U10.64@863.76,2100.31
  Bottom Layer w10: R22.2@460,1552 v2(460,1935)
RXD5: R20.2 U10.79 | length 1362.3
  Top Layer w10: v2(446,1194) 446,1612 505,1671 750,1671 789,1710 932.83,1710 983.83,1761 U10.79@983.83,1822.76
  Bottom Layer w10: R20.2@446,911 v2(446,1194)
SWCLK: SWD1.4 U10.76 | length 206.1
  Top Layer w10: U10.76@924.78,1822.76 924.78,1761.22 v2(925,1761)
  Bottom Layer w10: SWD1.4@864,1642 925,1703 v2(925,1761)
SWDIO: SWD1.2 U10.72 | length 807.8
  Top Layer w10: U10.72@863.76,1942.83 930.83,1942.83 942,1954 v2(1002,1954)
  Bottom Layer w10: v2(1002,1954) 1081,1875 1236,1875 1261,1850 1261,1714 1237,1690 1112,1690 SWD1.2@1064,1642
TA: P15.6 R23.2 | length 2406.6
  Top Layer w10: P15.6@895.37,3402.63 945.01,3452.28 1837.72,3452.28 1868,3422 v2(1868,3407) ; v2(1809,2116) v2(1809,2627)
  Bottom Layer w10: R23.2@1739,2117 1808,2117 v2(1809,2116) ; v2(1809,2627) 1809,2909.7 1868,2968.7 v2(1868,3407)
TB: P15.5 R24.2 | length 2449.6
  Top Layer w10: P15.5@795.37,3402.63 795.37,3445.37 827,3477 1876,3477 1911,3442 v2(1911,3410) ; v2(1837,2313) v2(1837,2639)
  Bottom Layer w10: R24.2@1733,2313 v2(1837,2313) ; v2(1837,2639) 1837,2904 1884,2951 1884,3373 1911,3400 v2(1911,3410)
TXD: P13.6 R53.1 TVS2.2 | length 729.6
  Bottom Layer w10: TVS2.2@3254.46,1740 3252,1742.46 R53.1@3252,1813 3300,1813 3318,1831 3318,2280 3352,2314 P13.6@3437,2314
TXD2: R9.2 U10.47 | length 1023.3
  Top Layer w10: v2(507,2085) 665,2085 v2(666,2086) ; v2(664,2492) 675,2503 963,2503 983.83,2482.17 U10.47@983.83,2417.24
  Bottom Layer w10: R9.2@471,2087 473,2085 v2(507,2085) ; v2(664,2492) 692.85,2463.15 692.85,2112.85 v2(666,2086)
TXD3: R10.2 U10.68 | length 1175.5
  Top Layer w10: v2(599,2003) 603,2007 746.43,2007 761,2021.57 U10.68@863.76,2021.57
  Bottom Layer w10: R10.2@487,2828 541,2828 599,2770 v2(599,2003)
TXD4: R21.2 U10.63 | length 1027.6
  Top Layer w10: v2(461,1984) 461,1994 521.38,2054.38 743.07,2054.38 808.69,2120 U10.63@863.76,2120
  Bottom Layer w10: R21.2@459,1452 497,1490 497,1948 v2(461,1984)
TXD5: R19.2 U10.80 | length 1471.2
  Top Layer w10: v2(485,1251) 485,1614 526,1655 758,1655 794,1691 956,1691 1003.52,1738.52 U10.80@1003.52,1822.76
  Bottom Layer w10: R19.2@449,812 485,848 v2(485,1251)
V5.0: C9.1 C35.2 P11.14 P12.4 P14.1 Q4.3 R52.1 R56.2 R60.2 U2.1 | length 9320.5
  Top Layer w10: v2(550,3180) 705,3335 v2(733,3335) ; v2(3119,2052.87) 3119,1854 3158,1815 v2(3158,1651) ; C35.2@3244.82,2593 3278,2593 3330,2645 3370,2645 P14.1@3433.06,2645
  Bottom Layer w10: v2(550,3180) 550,2952 572,2930 R56.2@589,2930 ; v2(733,3335) 745,3347 745,3449 777,3481 3145,3481 3188.5,3437.5 Q4.3@3188.5,3229.21 ; R60.2@3008,2053 3008,2052.87 v2(3119,2052.87)
  Bottom Layer w20: R52.1@2977,1683 3009,1651 v2(3158,1651) 3370,1651 3444.87,1576.13 P12.4@3444.87,1501 3626,1501 3627,1500 ; Q4.3@3188.5,3229.21 3380.79,3229.21 3426,3184 ; 3437,3173 3426,3184 ; 3627,2944 3627,2983 3426,3184
  Bottom Layer w30: C9.1@3006.02,515 3006.02,438.98 U2.1@3007,438 3208,438 3213,443 ; P11.14@3013.02,83 3169.32,83 3213,126.68 3213,443 ; P14.1@3433.06,2645 3569,2645 3627,2587 ; 3627,2944 3627,2587 ; 3213,443 3213,552 3283,622 3592,622 3627,657 3627,1500 3627,2587
V12: C6.2 C7.2 C8.1 D2.1 D7.2 D8.2 F2.2 P22.1 P27.1 Q11.7 Q11.8 R35.2 R43.2 | length 8742.5
  Top Layer w30: P27.1@1284,3196.37 1284,3307 1352,3375 1698,3375 1744,3329 P22.1@1744,3201 1873,3201 2141,3469 3038,3469 v2(3092,3415) ; v2(3054,2489) 3054,1822 3110,1766 v2(3110,1607) ; v2(3222,950) 3281,1009 v2(3281,1589)
  Top Layer w50: R35.2@1651.91,1067.16 1818,1067.16 ; Q11.8@1665.31,846.52 1667.83,844 F2.2@1819,844 C7.2@1819,925.37 1819,1066.16 1818,1067.16 ; C8.1@1904,1051 1887.84,1067.16 1818,1067.16
  Bottom Layer w10: R43.2@918,1138.79 918,1189 954,1225 1730,1225 C8.1@1904,1051 ; D2.1@1372,922 1559,922 v2(1636,845)
  Bottom Layer w20: P27.1@1284,3196.37 1284,3357.61 D8.2@1297.39,3371 ; P22.1@1744,3201 1744,3363.61 D7.2@1761.39,3381
  Bottom Layer w30: C8.1@1904,1051 2057,898 3170,898 v2(3222,950) ; v2(3054,2489) 3054,3377 v2(3092,3415) ; v2(3110,1607) 3128,1589 v2(3281,1589)
V12_SYS: C1.1 C3.2 P9.2 Q2.2 R2.1 U1.1 | length 4146.9
  Top Layer w40: P9.2@1031,580 1031,545 1131,445 v3(1545,445) ; U1.1@2636.86,1502.94 2651.29,1517.38 2767,1517.38 ; v3(2812,738) 2807,743 2807,1250 2770,1287 2770,1514.38 2767,1517.38 ; v1(3220,2128) 3220,1616 3119.91,1515.91 C3.2@2973,1515.91 2971.54,1517.38 C1.1@2862,1517.38 2767,1517.38
  Bottom Layer w10: R2.1@3205.32,2245 3205.32,2195.8 Q2.2@3220.13,2181
  Bottom Layer w40: v3(1545,445) 1545,622 1661,738 v3(2812,738) ; v1(3220,2128) 3220,2180.87 Q2.2@3220.13,2181
V12_SYS_OUT: P13.1 P13.4 Q2.3 | length 679.7
  Top Layer w20: P13.1@3433.06,1814 3304,1814 3268.43,1849.57 v2(3268.43,2082.57) 3305.57,2082.57 3337,2114 P13.4@3437,2114
  Bottom Layer w20: Q2.3@3182.72,2082.57 v2(3268.43,2082.57)
VALUE: C165.2 R187.2 U10.96 | length 3669.5
  Top Layer w10: U10.96@1318.48,1822.76 1318.48,1772.12 v2(1328.6,1762) ; v2(1677,2956) 1931,2956 v2(1966,2991)
  Bottom Layer w10: v2(1328.6,1762) 1330.6,1764 1392,1764 1404,1776 1975,1776 2894,2695 2894,2964 2866,2992 1967,2992 v2(1966,2991) ; C165.2@1606,2956 v2(1677,2956)
  Bottom Layer w20: R187.2@1543,2956 1543,2960.89 1601.77,2960.89 1604.9,2957.76 C165.2@1606,2957.76
VBAT: C28.1 C30.1 C31.1 D2.2 P28.2 Q12.5 Q12.6 Q12.7 Q12.8 R40.2 R48.1 R180.1 U7.15 | length 7040.2
  Top Layer w10: Q12.5@566.41,1137.37 564.91,1138.87 C31.1@564.91,1225.16 562.54,1227.53 C30.1@562.54,1306.16 562.54,1326.54 584.41,1348.41 R48.1@876.21,1348.41 902.63,1322 947.63,1322 998,1271.63 998,1227 1028.1,1196.9 U7.15@1054.91,1196.9 ; v2(782,1406) 864,1488 v2(1244,1488) ; R180.1@1765,1724 1767,1722 v2(1767,1488)
  Top Layer w30: Q12.8@653.91,1016.16 622.69,984.94 R40.2@622.69,735.16 622.69,532.31 769,386 1584,386 1619,421 v3(1619,614) ; Q12.8@694.27,983.63 694.27,915.73 740.84,869.16 C28.1@798.86,869.16 ; v3(2943,670) 3096,670 3303,877 P28.2@3435.94,877
  Bottom Layer w10: v2(782,1406) 730,1354 730,905 762,873 v1(762,870) 1241.26,870 D2.2@1293.26,922 ; v2(1244,1488) v2(1767,1488)
  Bottom Layer w30: v3(1619,614) 1676,671 1677,670 v3(2943,670)
VBAT_ADC: C164.1 R181.2 U10.18 | length 874.8
  Top Layer w10: U10.18@1458.24,2218.43 1534.43,2218.43 v2(1535,2219) ; R181.2@1643,1841 1712,1841 C164.1@1714,1843 1714,1872 1837,1995 v2(1837,2214)
  Bottom Layer w10: v2(1535,2219) 1540,2214 v2(1837,2214)
VBAT_STA: LED2.2 U7.9 U10.17 | length 1896.9
  Top Layer w10: U7.9@1189.07,1177.21 1232.84,1177.21 1325.9,1270.27 LED2.2@1395.46,1270.27 1427.73,1238 1500,1238 v2(1531,1269) ; v2(1327,1955) 1327,2157 1368.74,2198.74 U10.17@1458.24,2198.74 ; v2(1548,1809) 1548,1493 v2(1737,1304)
  Bottom Layer w10: v2(1327,1955) 1327,1862 1380,1809 v2(1548,1809) ; v2(1531,1269) 1702,1269 v2(1737,1304)
VCC_REF: C26.1 R38.2 R42.1 R47.2 R49.1 U7.12 | length 1062.5
  Top Layer w10: v2(840.82,1172.18) R38.2@876.21,1172.18 ; v2(1151,1288) 1151.53,1287.47 U7.12@1151.53,1235.45 ; v2(1363,1331) 1396.38,1331 R49.1@1397.21,1331.83 1457.21,1391.83 R47.2@1457.21,1393.61
  Bottom Layer w10: v2(840.82,1172.18) 840.82,1213.82 915,1288 v2(1151,1288) ; R42.1@1034.91,1442.16 1064.91,1412.15 1126.61,1412.15 C26.1@1153.91,1384.85 1153.91,1290.91 v2(1151,1288) ; v2(1363,1331) 1320,1288 v2(1151,1288)
VDD3V3: C5.2 C10.2 C17.2 C51.2 C52.2 C55.2 C56.2 C57.2 NC.1 P2.4 P3.4 P4.4 Q6.2 Q13.1 Q15.1 Q18.2 R1.1 R15.1 R62.2 R67.1 R68.1 R78.2 R183.2 R185.2 SWD1.1 U5.3 U5.7 U5.8 U9.8 U10.6 U10.11 U10.19 U10.28 U10.50 U10.75 U10.100 VR1.2 VR1.4 | length 14069.9
  Top Layer w10: P4.4@253.06,1989 253.06,1859.94 292,1821 747.44,1821 v2(810.22,1883.78) U10.75@863.76,1883.78 ; U10.100@1397.22,1822.76 1397.22,1872.78 v2(1383,1887) 1387,1891 1387,1921 1352,1956 v2@1352,1981 ; U10.6@1458.24,1982.2 v2(1353.2,1982.2) v2@1352,1981 ; U10.19@1458.24,2238.11 1502.11,2238.11 v2(1519,2255) 1525.48,2261.48 1555.11,2261.48 1596,2302.37 1596,2362 1618,2384 1685,2384 1699,2370 R78.2@1699,2349.33 ; v2(1527,2075) 1521.37,2080.63 U10.11@1458.24,2080.63 1384.69,2080.63 1352,2047.94 v2@1352,1981 ; VR1.4@2696.06,2486.09 2696.06,2350.94 2803,2244 R1.1@2866,2244
  Top Layer w15: v2(885,2408) 894.24,2417.24 U10.50@924.78,2417.24 ; v2(1370,2477) 1357.85,2464.85 U10.28@1357.85,2417.24 1357.85,2270.15 ; v2(1383,1887) 1351,1887 1301,1937 v2(1301,1958) 1301,2213.3 1357.85,2270.15 ; U10.19@1458.24,2238.11 1389.89,2238.11 1357.85,2270.15
  Top Layer w20: v2(975,2714) 1200,2714 v2(1233,2681) ; v1(2116,2927) 2116,2952.3 2305.7,3142 v1(2557,3142) ; v2(2257,1297) 2257,641 v2(2384,514) ; v1(2315,2522) 2315,2497 2328.46,2483.54 C10.2@2354,2483.54 C5.2@2421,2483.54 2523,2483.54 VR1.2@2525,2485.54 ; VR1.4@2696.06,2486.09 2939.91,2486.09 3023,2403 3023,2103 3002,2082 v2(3002,2014) 3002,1727 3037,1692 v2(3037,1571) ; v2(2729,1571) v2(2869,1571)
  Bottom Layer w10: v2(810.22,1883.78) C55.2@863.76,1883.78 863.76,1746.24 R183.2@870,1740 816,1686 816,1610 832,1594 863,1594 877,1580 R185.2@877,1555 1077,1555 SWD1.1@1164,1642 1247,1642 1287,1682 1287,1944 v2(1301,1958) ; C51.2@1458.24,2080.63 1463.87,2075 v2(1527,2075) ; C52.2@1464,2240 1504,2240 v2(1519,2255) ; Q18.2@2589.6,3202.57 2663.02,3276 R68.1@2747,3276 ; v2(3002,2014) 3002,2000.61 Q13.1@3029.21,1973.4 ; v2(3002.4,1816.4) Q15.1@3034.21,1816.4 ; v2(3037,1571) R67.1@3037,1616
  Bottom Layer w15: C57.2@1361,2411 1361,2468
  Bottom Layer w20: P2.4@253.06,715 123,715 91,747 91,1351 ; P3.4@253.06,1352 92,1352 91,1351 ; P4.4@253.06,1989 114,1989 91,1966 91,1351 ; NC.1@923,2775 U5.8@1026.37,2775 U5.7@1026.37,2725 986,2725 v2(975,2714) 963,2702 963,2605 857,2499 857,2436 v2(885,2408) C56.2@924,2408 ; v2(1370,2477) 1361,2468 1354,2461 1163.5,2461 1147.5,2477 1147.5,2494.5 v2(1175,2522) 1176,2523 1176,2666 1189,2679 1312.37,2679 U5.3@1316.37,2675 1407,2675 1428,2696 NC.1@1428,2715 1603,2715 1754,2564 2027,2564 2053,2590 2053,2891 2087,2925 2252,2925 2317,2860 2317,2524 v1(2315,2522) ; v2@2256,1296 v2(2257,1297) C17.2@2569.93,1297 ; v2(2384,514) 2384,414 2423,375 2557,375 2577,355 2577,298 2591.4,283.6 Q6.2@2628.43,283.6 2630.02,282 v2(2662,282) 2684,282 R15.1@2693,291 ; v1(2557,3142) 2557,3169.98 Q18.2@2589.6,3202.57 ; C17.2@2569.93,1298 U9.8@2714.39,1298 2714.39,1377.39 2729,1392 v2(2729,1571) ; v2(2869,1571) v2(3037,1571) ; Q13.1@3029.21,1973.4 3037.61,1965 R62.2@3087,1965
VDD3V3_OUT: P11.6 Q6.3 | length 369.2
  Top Layer w20: v2(2482,322) 2529,322 2562,289 2562,134.02 P11.6@2613.02,83
  Bottom Layer w20: v2(2482,322) 2483,321 Q6.3@2530,321
VDD3V3_OUTB: C16.2 C18.2 Q18.3 U3.17 | length 370.2
  Top Layer w20: C18.2@2600.49,3398 2675,3398 v1(2676,3397) C16.2@2760,3397 2748,3385 U3.17@2748,3308
  Bottom Layer w20: Q18.3@2627,3301 2676,3350 v1(2676,3397)
VDD3V3A: L3.1 U6.2 | length 2207.9
  Top Layer w10: L3.1@1699,2410 1734,2410 v2(1744,2420) ; U6.2@1899,1559.42 v2(1899,1721.74) ; v2(1914,2396) 1914,2300 v2(1922,2292) ; v2(2234,2391) 2325,2300 v2(2606,2300)
  Bottom Layer w10: v2(1744,2420) 1890,2420 v2(1914,2396) ; v2(1899,1721.74) 2027.74,1721.74 v2(2606,2300) ; v2(1922,2292) 2135,2292 v2(2234,2391)
VDD5V: C13.2 C21.1 F1.2 P5.4 Q4.2 R6.1 R25.2 R26.2 R27.2 R30.1 U6.1 VR1.3 | length 8195.2
  Top Layer w10: U6.1@1977.74,1559.42 1991.58,1559.42 2010.52,1540.48 C21.1@2052,1540.48
  Top Layer w20: v2(6,529) 6,2515 117,2626 P5.4@253.06,2626 ; v1(231,587) v1(358,587) ; F1.2@1928,1855.68 v2(1928,1805) 1928,1767 1977.74,1717.26 U6.1@1977.74,1559.42 ; v2(1981,863) 2010.52,892.52 2010.52,1540.48 ; C13.2@2416,2396.54 2514.51,2396.54 VR1.3@2516.06,2394.98 2516.06,2367.06 v2(2482,2333) ; v2(2861,2931) 2861,2990 2945,3074 v2(3104,3074)
  Bottom Layer w20: v2(6,529) 65,529 123,587 v1(231,587) ; v1(358,587) 410,587 422,575 R26.2@422,527.06 460.06,489 684,489 724,529 R27.2@762,529 762,682 807,727 890,727 913,704 R30.1@913,670 925,670 976,619 976,531 1001,506 1159.06,506 1189.11,536.06 R25.2@1238,536.06 1288.06,486 1457,486 1497,526 1497,648 1623,774 1892,774 v2(1981,863) ; v2(1928,1805) 1954,1805 v2(2482,2333) 2861,2712 v2(2861,2931) ; v2(3104,3074) 3152.32,3074 R6.1@3153.32,3075 3153.32,3128.57 Q4.2@3151.1,3130.79
pads on no net: U3.2 U3.3 U3.20 U3.21 U3.23 U3.24 U8.2 U8.10 U8.11 U8.12 U8.13 U8.14 U9.5 U9.6 U9.7 U10.2 U10.3 U10.38 U10.42 U10.43 U10.44 U10.61 U10.62 U10.65 U10.66 U10.67 U10.78 U10.81 U10.82 U10.83 U10.84 U10.85 U10.87 U10.88 U10.98

## Polygon pours and split planes (outlines as drawn)
GND on Top Layer "Top Layer-No Net" (solid, remove dead copper, pour order 0): -127,3542 -83,3586 3814,3586 3814,-68 3809,-73 3682,-200 111,-200 -83,-200 -312,29 -117,224 -117,3556
GND on Bottom Layer "Top Layer-No Net" (solid, remove dead copper, pour order 2): -152,3527 -93,3586 3882,3586 3882,33 3649,-200 3605,-244 -161,-244 -161,171 -161,3547

## Keep-outs
Keep-Out Layer:
  circle w5: c96.8,137.8 r118.11
  lines w10: -39.37,39.37 ccw(c0,39.37) 0,0 3660.79,0 ; -39.37,40.37 -39.37,3465.57 ; -39.37,3465 cw(c0,3465) 0,3504.37 3648.86,3504.37 cw(c3654.43,3459.43) 3699.37,3465 ; 3660,0 ccw(c3660,39.37) 3699.37,39.37 ; 3699.37,40.37 3699.37,3465.57
Mechanical 1:
  lines w10: -909,11194.01 cw(c-903.43,11149.07) -858.49,11154.64 ; -39.37,39.37 ccw(c0,39.37) 0,0 3660.79,0 ; -39.37,40.37 -39.37,3465.57 ; -39.37,3465 cw(c0,3465) 0,3504.37 3648.86,3504.37 cw(c3654.43,3459.43) 3699.37,3465 ; 3660,0 ccw(c3660,39.37) 3699.37,39.37 ; 3699.37,40.37 3699.37,3465.57

## Other copper
Top Layer:
  rectangle net GND: 2407,754 2599,1328
  rectangle net GND: 1089,1150 1155,1197
  region net NetDS1_1: 2025,219 2036,230 2036,340 1982,394 1913,394 1861,446 1861,678.16 1842.16,697 1765,697 1751,683 1751,435 1830,356 1830,227 1838,219
  pour cut-out: 2332,635 2335,638 2771,638 2771,387 2770,388 2317,388 2317,619 2332,634

## Silkscreen, mask and mechanical layers (free items; w line width, h text height)
Top Overlay:
  circle w19.68: c3552,3375 r98.43
  circle w19.68: c3554,136 r98.43
  circle w19.68: c97.8,138.8 r98.43
  circle w19.68: c95.8,3354 r98.43
  text "心音" at 3785,2804 h40
  text "血压" at 3755,2007 h40
  text "呼吸" at 3774,1319 h40
Mechanical 1:
  circle w5: c96.8,137.8 r118.11

## Text inside footprints (layer, text, board x,y; h text height)
C8: Top Overlay "+" at 1932,1092.9 h40 r270
P11: Top Overlay "2" at 2283,64 h40; Top Overlay "1" at 2290,175 h40; Top Overlay "14" at 3087,64 h40; Top Overlay "13" at 3086,173 h40
U2: Top Overlay "-Vout" at 2692,613 h40 r270; Top Overlay "+Vin" at 2992,588 h40 r270; Top Overlay "-Vin" at 2892,588 h40 r270; Top Overlay "+Vout" at 2492,613 h40 r270